# EAGLE board PCB_v5 (EAGLE 9.7.0)
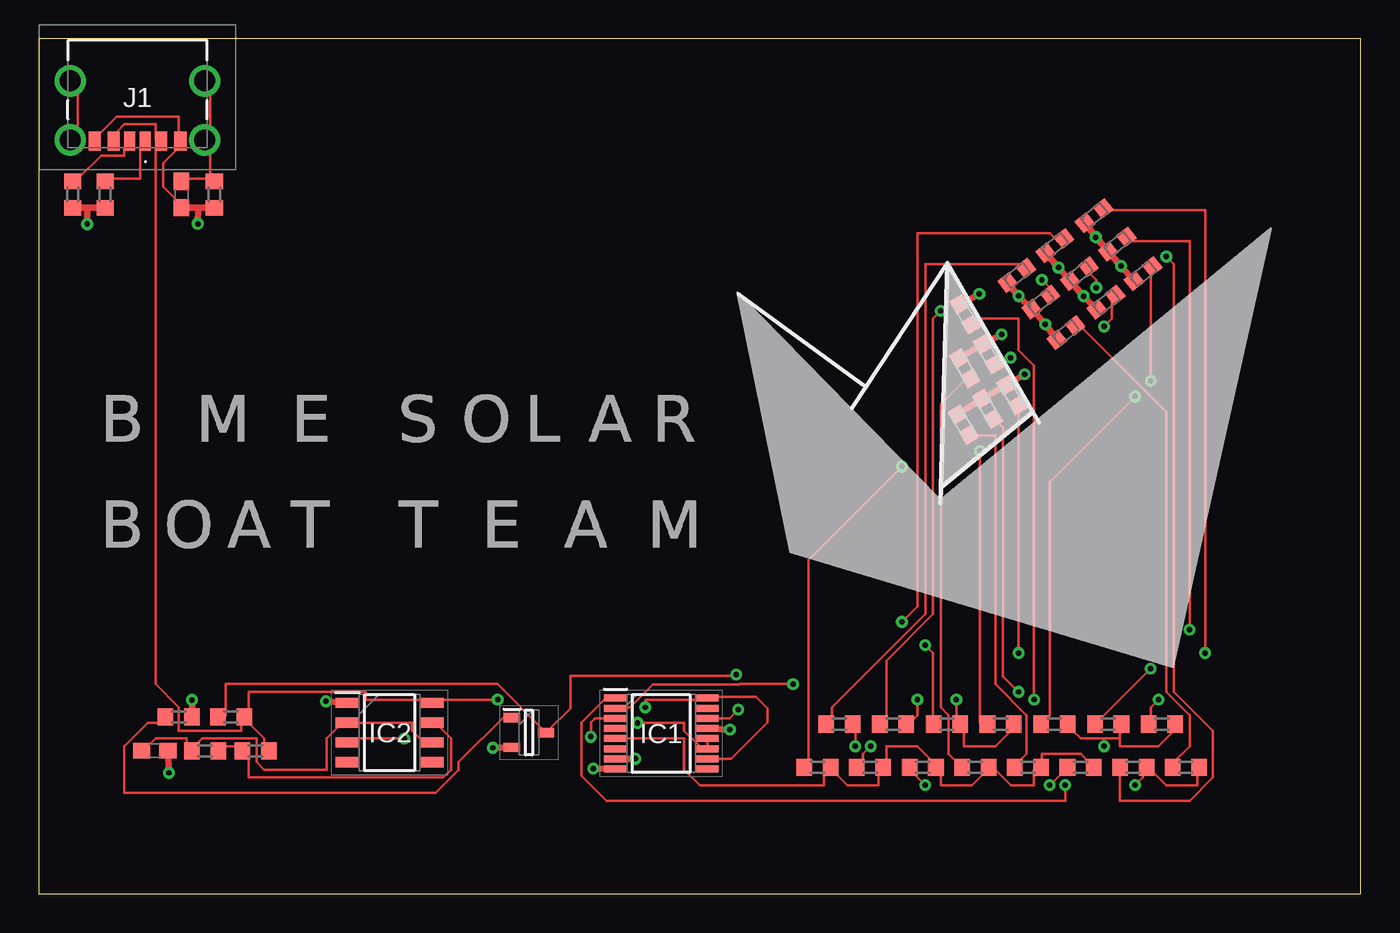
[diagram p0: board, top side]
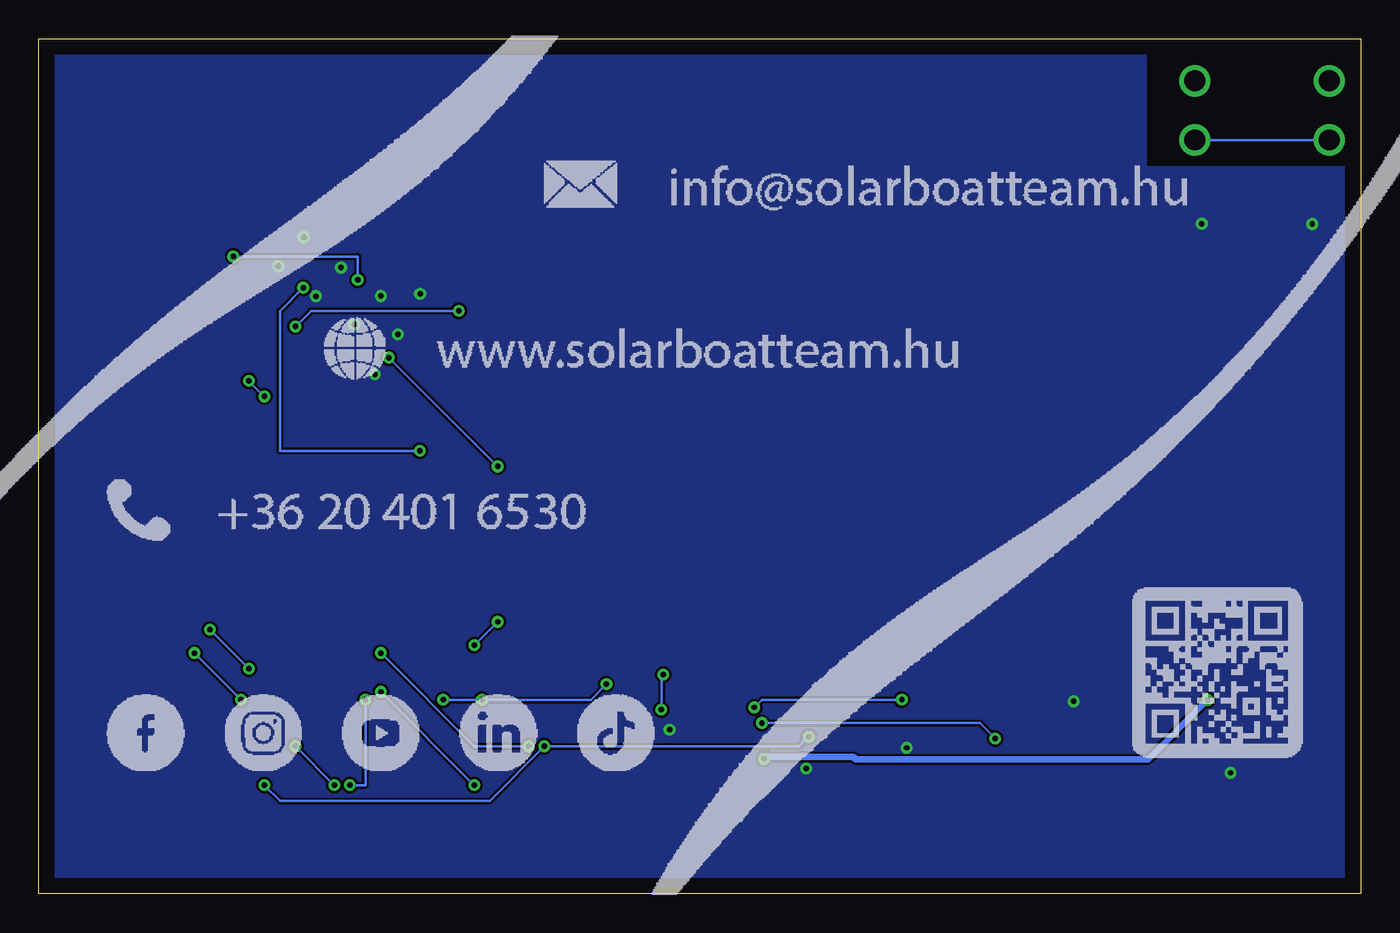
[diagram p1: board, bottom side, seen from below]

Size 85 x 55 mm. Coordinates in mm from the lower left corner, seen from the top.
Outline: 0,0 85,0 85,55 0,55 0,0
Copper layers (1*16): Top 0.035mm / dielectric 1.5mm / Bottom 0.035mm
Design rules "default": minimum track width 6mil, minimum drill 0.35mm, track to track 6mil, track to pad 6mil, pad to pad 6mil, via to via 6mil, smd to smd 6mil, copper to edge 40mil, drill to drill 6mil, minimum pad ring 10mil, minimum via ring 8mil, stop-mask expansion 4mil, vias tented up to drill 0mil, thermal gap 10mil

## Footprints (pad centres in the part's own frame; a part is rotated, then mirrored left to right if it is on the bottom)
C0603 = smd 1.1 x 1: 1 -0.85,0; 2 0.85,0
SOP65P640X110-16N = smd 1.475 x 0.45: 1 -2.938,2.275; 2 -2.938,1.625; 3 -2.938,0.975; 4 -2.938,0.325; 5 -2.938,-0.325; 6 -2.938,-0.975; 7 -2.938,-1.625; 8 -2.938,-2.275; 9 2.938,-2.275; 10 2.938,-1.625; 11 2.938,-0.975; 12 2.938,-0.325; 13 2.938,0.325; 14 2.938,0.975; 15 2.938,1.625; 16 2.938,2.275
SOIC127P600X175-8N = smd 1.528 x 0.65: 1 -2.711,1.905; 2 -2.711,0.635; 3 -2.711,-0.635; 4 -2.711,-1.905; 5 2.711,-1.905; 6 2.711,-0.635; 7 2.711,0.635; 8 2.711,1.905
1016435900011LF = smd 0.7 x 1.2: A5 -0.5,3.03; B5 0.5,3.03 | smd 0.76 x 1.2: A9 1.52,3.03; B9 -1.52,3.03 | smd 0.8 x 1.2: A12 2.75,3.03; B12 -2.75,3.03 | drill 1.34 pad 1.85: MH1 -4.32,2.95; MH2 4.32,2.95 | drill 1.34 pad 2.01: MH3 -4.32,-0.85; MH4 4.32,-0.85
LEDC1608X80N = smd 0.95 x 0.95: 1 -0.75,0; 2 0.75,0
SOT95P230X110-3N = smd 1.05 x 0.6: 1 -1.1,0.95; 2 -1.1,-0.95; 3 1.1,0
R0603 = smd 1 x 1.1: 1 -0.85,0; 2 0.85,0

## Placement (x,y rotation side)
C1  1n  [C0603]  9.18,44.98 270 top
C2  4.7u  [C0603]  7.45,9.21 0 top
IC1  74HC595PW-Q100,118  [SOP65P640X110-16N]  40.02,10.32 0 top
IC2  NE555DR  [SOIC127P600X175-8N]  22.56,10.38 0 top
J1  10164359-00011LF  [1016435900011LF]  6.34,51.45 180 top
LED1  150060BS75000  [LEDC1608X80N]  67.86,43.64 38 top
LED2  150060BS75000  [LEDC1608X80N]  69.35,41.8 38 top
LED3  150060BS75000  [LEDC1608X80N]  71.01,39.9 38 top
LED4  150060BS75000  [LEDC1608X80N]  66.91,39.89 38 top
LED5  150060BS75000  [LEDC1608X80N]  65.33,41.71 38 top
LED6  150060BS75000  [LEDC1608X80N]  68.63,38.06 38 top
LED7  150060BS75000  [LEDC1608X80N]  62.89,39.79 38 top
LED8  150060BS75000  [LEDC1608X80N]  66.05,36.1 38 top
LED9  150060BS75000  [LEDC1608X80N]  64.44,38.08 38 top
LED10  150060BS75000  [LEDC1608X80N]  59.58,37.27 300 top
LED11  150060BS75000  [LEDC1608X80N]  59.44,30.19 300 top
LED12  150060BS75000  [LEDC1608X80N]  59.54,33.81 300 top
LED13  150060BS75000  [LEDC1608X80N]  61.01,31.2 300 top
LED14  150060BS75000  [LEDC1608X80N]  62.58,32.07 300 top
LED15  150060BS75000  [LEDC1608X80N]  61.06,34.7 300 top
Q1  PMBT3904,235  [SOT95P230X110-3N]  31.52,10.38 0 top
R1  5.1K  [R0603]  4.26,44.98 90 top
R2  5.1K  [R0603]  2.17,44.98 90 top
R3  100k  [R0603]  11.29,44.98 90 top
R4  68K  [R0603]  13.93,9.21 0 top
R5  68K  [R0603]  10.69,9.21 0 top
R6  1K  [R0603]  12.36,11.4 0 top
R7  15K  [R0603]  9,11.4 0 top
R8  330R  [R0603]  72.22,10.93 0 top
R9  330R  [R0603]  68.76,10.93 0 top
R10  330R  [R0603]  65.31,10.93 0 top
R11  330R  [R0603]  61.85,10.93 0 top
R12  330R  [R0603]  58.39,10.93 0 top
R13  330R  [R0603]  54.94,10.93 0 top
R14  330R  [R0603]  51.48,10.93 0 top
R15  330R  [R0603]  73.76,8.13 0 top
R16  330R  [R0603]  70.38,8.13 0 top
R17  330R  [R0603]  66.99,8.13 0 top
R18  330R  [R0603]  63.61,8.13 0 top
R19  330R  [R0603]  60.22,8.13 0 top
R20  330R  [R0603]  56.84,8.13 0 top
R21  330R  [R0603]  53.45,8.13 0 top
R22  330R  [R0603]  50.07,8.13 0 top

## Library data of the parts
C1 C2 R1-R22 = resistor
IC1 = 74HC595PW-Q100_118; DESCRIPTION: 74HC(T)595-Q100 - 8-bit serial-in, serial or parallel-out shift register with output latches; 3-state@en-us; HEIGHT: 1.1mm; MANUFACTURER_NAME: Nexperia; MANUFACTURER_PART_NUMBER: 74HC595PW-Q100,118; MOUSER_PART_NUMBER: 771-74HC595PW-Q100; MOUSER_PRICE-STOCK: https://www.mouser.co.uk/ProductDetail/Nexperia/74HC595PW-Q100118?qs=1sbE9T7hb3aHrTORCcEuDg%3D%3D
IC2 = NE555DR; DESCRIPTION: Single Precision Timer; HEIGHT: 1.75mm; MANUFACTURER_NAME: Texas Instruments; MANUFACTURER_PART_NUMBER: NE555DR; MOUSER_PART_NUMBER: 595-NE555DR; MOUSER_PRICE-STOCK: https://www.mouser.co.uk/ProductDetail/Texas-Instruments/NE555DR?qs=gb35HGp1gQJ5U8ZthvvoVQ%3D%3D
J1 = 10164359-00011LF; DESCRIPTION: USB Type C Receptacle SMT Single Row 6Pin; HEIGHT: 3.41mm; MANUFACTURER_NAME: Amphenol; MANUFACTURER_PART_NUMBER: 10164359-00011LF; MOUSER_PART_NUMBER: 649-10164359-00011LF; MOUSER_PRICE-STOCK: https://www.mouser.co.uk/ProductDetail/Amphenol-FCI/10164359-00011LF?qs=MyNHzdoqoQLpQ%2FmSqA1%252BtQ%3D%3D
LED1-LED15 = Library; DESCRIPTION: LED,Wurth Elektronik,150060BS75000 Wurth Elektronik 150060BS75000, WL-SMCW Series Blue LED, 470 nm 1608 (0603) Clear, Rectangle Lens SMD package; HEIGHT: 0.8mm; MANUFACTURER_NAME: Wurth Elektronik; MANUFACTURER_PART_NUMBER: 150060BS75000; MOUSER_PART_NUMBER: 710-150060BS75000; MOUSER_PRICE-STOCK: https://www.mouser.co.uk/ProductDetail/Wurth-Elektronik/150060BS75000?qs=LlUlMxKIyB2DLLpXQThavA%3D%3D
Q1 = PMBT3904_235; DESCRIPTION: PMBT3904 - 40 V, 200 mA NPN switching transistor@en-us; HEIGHT: 1.1mm; MANUFACTURER_NAME: Nexperia; MANUFACTURER_PART_NUMBER: PMBT3904,235; MOUSER_PART_NUMBER: 771-PMBT3904235; MOUSER_PRICE-STOCK: https://www.mouser.co.uk/ProductDetail/Nexperia/PMBT3904235?qs=LOCUfHb8d9uziIfl4fmvZg%3D%3D

## Nets
GND: C1.2 C2.2 IC1.8 IC1.13 IC2.1 J1.A12 J1.B12 LED1.1 LED2.1 LED3.1 LED4.1 LED5.1 LED6.1 LED7.1 LED8.1 LED9.1 LED10.1 LED11.1 LED12.1 LED13.1 LED14.1 LED15.1 Q1.2 R1.1 R2.1 R3.1
N$1: C1.1 J1.MH1 J1.MH2 J1.MH3 J1.MH4 R3.2
N$2: J1.B5 R2.2
N$3: J1.A5 R1.2
N$4: C2.1 IC2.2 IC2.6 R5.1
N$5: IC2.7 R4.1 R5.2
N$6: IC1.14 Q1.3 R6.1
N$7: IC1.11 IC1.12 IC2.3
N$8: IC1.7 R7.2
N$9: Q1.1 R7.1
N$10: LED1.2 R8.1
N$11: LED2.2 R9.1
N$12: LED3.2 R10.1
N$13: IC1.1 R8.2 R9.2 R10.2
N$14: LED4.2 R11.1
N$15: LED5.2 R12.1
N$16: LED6.2 R13.1
N$17: IC1.2 R11.2 R12.2 R13.2
N$18: LED7.2 R14.1
N$19: LED8.2 R15.1
N$20: LED9.2 R16.1
N$21: IC1.3 R14.2 R15.2 R16.2
N$22: LED10.2 R17.1
N$23: LED11.2 R18.1
N$24: LED12.2 R19.1
N$25: IC1.5 R17.2 R18.2 R19.2 R20.2 R21.2 R22.2
N$26: LED13.2 R20.1
N$27: LED14.2 R21.1
N$28: LED15.2 R22.1
VCC: IC1.10 IC1.16 IC2.8 J1.A9 J1.B9 R4.2 R6.2

## Tracks (layer width: path | path; a pad name or v marks a point on that pad's centre or on a via)
GND  (via drill 0.35)
  Top 0.152: J1.A12 3.5,48.5 5,50 9,50 9,48.5 J1.B12 9,48 8,47 8,45.5 9,44.5 C1.2
  Top 0.406: LED10.1 v60.48,38.6 | v61.92,36 LED15.1 LED12.1 | LED11.1 LED13.1 LED14.1 v63.39,33.42 | LED7.1 v63,38.46 LED9.1 v64.72,36.64 LED8.1 | LED5.1 v65.57,40.29 LED4.1 v67.18,38.45 LED6.1 | LED1.1 v67.97,42.24 LED2.1 v69.59,40.39 LED3.1 | IC1.13 v44.44,10.57 | IC1.8 v35.66,8.07 | Q1.2 v29.19,9.4 | C2.2 v8.36,7.79 | IC2.1 v18.46,12.39 | C1.2 10.25,44.13 | 10.25,44.13 R3.1 | 10.25,44.13 v10.22,43.11 | R2.1 3.12,44.13 | 3.12,44.13 R1.1 | 3.12,44.13 v3.11,43.09
  pour Bottom: 13.79,46.78 13.77,46.76 13.75,46.74 -2.75,46.74 -2.75,-1.36 93.17,-1.36 93.17,57.06 89.84,57.06 13.81,56.42 13.81,46.8
N$1
  Top 0.152: J1.MH2 2.5,48.5 2.5,52 J1.MH4 | 11,46 9.5,46 C1.1 | 11,46 R3.2 11,46 | 11,48.5 11,46 | 11,48.5 J1.MH1 11,48.5 | 11,48.5 11,52 J1.MH3
  Bottom 0.152: J1.MH2 2.5,48.5 10.5,48.5 J1.MH1
N$2
  Top 0.152: R2.2 2.5,46 4,47.5 5.5,47.5 5.5,48 J1.B5
N$3
  Top 0.152: R1.2 4.5,46 6.5,46 6.5,48 J1.A5
N$4
  Top 0.152: C2.1 7,9.5 7.5,10 9.5,10 9.5,9.5 R5.1 10,9.5 10.5,10 14,10 14,8.5 14.5,8 18.5,8 18.5,10 19.5,11 IC2.2 20,11 24,11 24,10.5 25,9.5 IC2.6
N$5
  Top 0.152: R5.2 12,9.5 13,9.5 R4.1 13.5,9 13.5,7.5 26,7.5 26.5,8 26.5,10 25.5,11 IC2.7
N$6  (via drill 0.35)
  Top 0.152: R6.1 12,11.5 12,13.5 29.5,13.5 32.5,10.5 Q1.3 34.18,11.95 34.18,14.03 44.74,14.03 44.77,14.03 v44.84,14.1 | v44.97,11.86 44.41,11.3 IC1.14
  Bottom 0.152: v44.84,14.1 44.97,13.97 v44.97,11.86
N$7  (via drill 0.35)
  Top 0.152: IC1.12 43,10 43,9.5 IC1.11 42.5,9.5 41.5,10.5 41.5,11 v38.5,11 | v23.5,10 20,10 IC2.3
  Bottom 0.152: v23.5,10 24.5,11 v38.5,11
N$8  (via drill 0.35)
  Top 0.406: IC1.7 v38.35,8.7 | v9.85,12.48 R7.2
  Bottom 0.406: v38.35,8.7 38.24,8.8 32.63,8.8 32.49,8.67 13.66,8.67 v9.85,12.48
N$9
  Top 0.152: Q1.1 30,11.5 27,8.5 27,8 25.5,6.5 5.5,6.5 5.5,9.5 7,11 8,11 R7.1
N$10  (via drill 0.35)
  Top 0.152: v75,15.5 75,44 68.5,44 LED1.2 | v72,12.5 71.5,12 71.5,11 R8.1
  Bottom 0.152: v72,12.5 v75,15.5
N$11  (via drill 0.35)
  Top 0.152: v74,17 74,42 70,42 LED2.2 | v71.5,14.5 68,11 R9.1
  Bottom 0.152: v71.5,14.5 v74,17
N$12  (via drill 0.35)
  Top 0.152: v71.5,33 71.5,40 LED3.2 | v70.5,32 65,26.5 65,11.5 64.5,11 R10.1
  Bottom 0.152: v70.5,32 v71.5,33
N$13  (via drill 0.35)
  Top 0.152: 69.5,10 68.5,10 | 68.5,10 67,10 66.5,10.5 R10.2 | 69.5,10 69.5,10.5 R9.2 | 69.5,10 69.5,9.5 72,9.5 73,10.5 R8.2 | v66,7 66,6 36.5,6 34.89,7.61 34.89,11.04 36.35,12.5 37,12.5 IC1.1 | 68.5,10 v68.5,9.5
  Bottom 0.152: v68.5,9.5 v66,7
N$14  (via drill 0.35)
  Top 0.152: v68,39 68,39.5 67.5,40 LED4.2 | v60.5,28.5 60.5,11 R11.1
  Bottom 0.152: v68,39 69.5,37.5 69.5,28.5 v60.5,28.5
N$15  (via drill 0.35)
  Top 0.152: v55.5,17.5 56.5,18.5 56.5,42.5 65,42.5 65.5,42 LED5.2 | v57,16 57.5,15.5 57.5,11 R12.1
  Bottom 0.152: v57,16 v55.5,17.5
N$16  (via drill 0.35)
  Top 0.152: v68.5,36.5 69,37 69,38.5 LED6.2 | v58,37.5 57.5,37 57.5,18 54.5,15 54.5,11 R13.1
  Bottom 0.152: v68.5,36.5 67.5,37.5 v58,37.5
N$17  (via drill 0.35)
  Top 0.152: v56.5,12.5 56.5,11.5 56,11 R13.2 | v59,12.5 59,11 R12.2 59.5,10.5 59.5,9.5 61.5,9.5 62.5,10.5 R11.2 | IC1.2 37.5,12 38,12 39.49,13.49 45.09,13.49 45.1,13.5 v48.5,13.5
  Bottom 0.152: v59,12.5 v56.5,12.5 49.5,12.5 v48.5,13.5
N$18
  Top 0.152: LED7.2 63.5,40.5 57,40.5 57,18 51,12 51,11 R14.1
N$19
  Top 0.152: LED8.2 67,36.5 72.5,31 72.5,13 74,11.5 74,9.5 73,8.5 R15.1
N$20  (via drill 0.35)
  Top 0.152: v64.5,39.5 65,39 LED9.2 | v72.5,41 73,40.5 73,13 75.5,10.5 75.5,7.5 74,6 69.5,6 69.5,8 R16.1
  Bottom 0.152: v64.5,39.5 64.5,41 v72.5,41
N$21  (via drill 0.35)
  Top 0.152: R15.2 74.5,8 74.5,7 72.5,7 71.5,8 R16.2 71,8 71,7.5 v70.5,7 | v52.5,9.5 52.5,10.5 R14.2 | v35.5,10.11 35.5,11.03 35.74,11.27 35.77,11.3 IC1.3
  Bottom 0.152: v70.5,7 69.5,6 56,6 v52.5,9.5 36.11,9.5 v35.5,10.11
N$22  (via drill 0.35)
  Top 0.152: v64,12.5 64,34 63,35 63,37 60,37 LED10.2 | v65,7 66,8 R17.1
  Bottom 0.152: v64,12.5 64,7 v65,7
N$23
  Top 0.152: LED11.2 60,29.5 61.5,29.5 61.5,13.5 63.5,11.5 63.5,9 63,8.5 R18.1
N$24
  Top 0.152: LED12.2 59.5,33 58,31.5 58,12 58.5,11.5 58.5,9 59,8.5 R19.1
N$25
  Top 0.152: R17.2 67.5,8.5 67,9 64.5,9 64.5,8.5 R18.2 64,8 64,7 62.5,7 61.5,8 R19.2 61,8 60,7 58,7 58,8 R20.2 57.5,8.5 56.5,9.5 54.5,9.5 54.5,8.5 R21.2 54,8 54,7 52,7 51,8 R22.2 50.5,8 50.5,7 42.5,7 41.5,8 41.5,10 37.5,10 IC1.5
N$26  (via drill 0.35)
  Top 0.152: v63,13 62,14 62,30 61.5,30.5 LED13.2 | v57,7 56,8 R20.1
  Bottom 0.152: v57,7 v63,13
N$27  (via drill 0.35)
  Top 0.152: v63,15.5 63,31 LED14.2 | v53.5,9.5 53,9 53,8.5 R21.1
  Bottom 0.152: v63,15.5 57,9.5 v53.5,9.5
N$28  (via drill 0.35)
  Top 0.152: v62.5,34.5 61.5,34.5 LED15.2 | v55.5,27.5 49.5,21.5 49.5,8.5 R22.1
  Bottom 0.152: v55.5,27.5 v62.5,34.5
VCC  (via drill 0.35)
  Top 0.152: v39,12 39,12.5 42.5,12.5 IC1.16 43.03,12.67 46.1,12.67 46.84,11.93 46.84,11.03 44.51,8.7 IC1.10 | v29.5,12.5 25.5,12.5 IC2.8 25,12.5 21,12.5 21,13 13.5,13 13.5,11.5 R6.2 | J1.A9 5,48.5 5,49 5.5,49.5 7.5,49.5 7.5,48.5 J1.B9 7.5,48 7.5,13.5 9,12 9,10.5 13,10.5 13,11 R6.2 | R6.2 13.5,11 14.5,10 14.5,9.5 R4.2
  Bottom 0.152: v39,12 38.5,12.5 v29.5,12.5